# EAGLE board Left Ear Board (EAGLE 8.4.1)

No outline drawn. Coordinates in mm, seen from the top.
Copper layers (1*16): Top 0.0356mm / dielectric 1.5011mm / Bottom 0.0356mm
Design rules "OSH_PCB Rules": minimum track width 6mil, minimum drill 13mil, track to track 6mil, track to pad 6mil, pad to pad 6mil, via to via 6mil, smd to smd 6mil, copper to edge 15mil, drill to drill 6mil, minimum pad ring 7mil, minimum via ring 7mil, stop-mask expansion 3mil, vias tented up to drill 0mil, thermal gap 10mil

## Footprints (pad centres in the part's own frame; a part is rotated, then mirrored left to right if it is on the bottom)
1X04 = drill 1.016 long: 1 -3.81,0; 2 -1.27,0; 3 1.27,0; 4 3.81,0
1X02 = drill 1.016 long: 1 -1.27,0; 2 1.27,0
MC00L1NCQF = drill 1.168: P$1 3.708,0.66; P$2 3.058,3.086; P$3 1.283,4.862; P$4 -1.143,5.512; P$5 -3.569,4.862; P$6 -5.344,3.086; P$7 -5.994,0.66; P$8 -5.344,-1.765; P$9 -3.569,-3.541; P$10 -1.143,-4.191; P$11 1.283,-3.541; P$12 3.058,-1.765; P$13 -1.143,0.66
SOIC-16 = smd 0.6 x 1.55: 1 0,0; 2 1.27,0; 3 2.54,0; 4 3.81,0; 5 5.08,0; 6 6.35,0; 7 7.62,0; 8 8.89,0; 9 8.89,5.4; 10 7.62,5.4; 11 6.35,5.4; 12 5.08,5.4; 13 3.81,5.4; 14 2.54,5.4; 15 1.27,5.4; 16 0,5.4
SOIC-14 = smd 0.55 x 1.5: 1 -3.81,-2.7; 2 -2.54,-2.7; 3 -1.27,-2.7; 4 0,-2.7; 5 1.27,-2.7; 6 2.54,-2.7; 7 3.81,-2.7; 8 3.81,2.7; 9 2.54,2.7; 10 1.27,2.7; 11 0,2.7; 12 -1.27,2.7; 13 -2.54,2.7; 14 -3.81,2.7

## Placement (x,y rotation side)
JP1  [1X04]  19.05,1.27 0 top
JP2  [1X02]  33.02,1.27 0 top
JP3  [1X02]  3.81,22.86 90 top
JP4  [1X02]  3.81,8.89 90 top
JP5  [1X02]  60.96,22.86 90 top
JP6  [1X02]  60.96,8.89 90 top
JP7  [1X04]  46.99,1.27 0 top
U$1  12-POSITION-ROTARY  [MC00L1NCQF]  31.75,34.29 270 top
U$2  SN74LS148D  [SOIC-16]  21.59,20.32 0 top
U$3  SN74LS148D  [SOIC-16]  36.83,20.32 0 top
U$4  QUAD_NAND  [SOIC-14]  33.02,12.7 0 top

## Library data of the parts
JP1-JP7 = pinhead
U$1-U$4 = FormE

## Nets
0: JP1.1 U$4.11
1: JP1.2 U$4.8
2: JP1.3 U$4.6
3: JP1.4 U$2.5 U$3.15
GND: JP2.2 JP3.2 JP4.2 JP5.2 JP6.2 U$1.P$13 U$2.8 U$3.8
N$1: U$1.P$12 U$2.10
N$2: U$2.9 U$4.13
N$3: U$3.9 U$4.12
N$4: U$2.7 U$4.10
N$5: U$3.7 U$4.9
N$6: U$2.6 U$4.5
N$7: U$3.6 U$4.4
N$8: U$2.14 U$4.2
N$9: U$3.14 U$4.1
N$10: U$1.P$4 U$3.10
N$11: U$1.P$3 U$3.11
N$12: U$1.P$2 U$3.12
N$13: U$1.P$1 U$3.13
N$14: U$1.P$11 U$2.11
N$15: U$1.P$10 U$2.12
N$16: U$1.P$9 U$2.13
N$17: U$1.P$8 U$2.1
N$18: U$1.P$7 U$2.2
N$19: U$1.P$6 U$2.3
N$20: U$1.P$5 U$2.4
N$21: JP3.1 JP7.1
N$22: JP4.1 JP7.2
N$23: JP5.1 JP7.3
N$24: JP6.1 JP7.4
VCC: JP2.1 U$2.16 U$3.16 U$4.14

## Tracks (layer width: path | path; a pad name or v marks a point on that pad's centre or on a via)
0  (1 unrouted)
1  (1 unrouted)
2  (1 unrouted)
3  (2 unrouted)
GND  (7 unrouted)
N$1  (1 unrouted)
N$2  (1 unrouted)
N$3  (1 unrouted)
N$4  (1 unrouted)
N$5  (1 unrouted)
N$6  (1 unrouted)
N$7  (1 unrouted)
N$8  (1 unrouted)
N$9  (1 unrouted)
N$10  (1 unrouted)
N$11  (1 unrouted)
N$12  (1 unrouted)
N$13  (1 unrouted)
N$14  (1 unrouted)
N$15  (1 unrouted)
N$16  (1 unrouted)
N$17  (1 unrouted)
N$18  (1 unrouted)
N$19  (1 unrouted)
N$20  (1 unrouted)
N$21  (1 unrouted)
N$22  (1 unrouted)
N$23  (1 unrouted)
N$24  (1 unrouted)
VCC  (3 unrouted)